# Altium PCB TDII_PCB_R00.PcbDoc
Units mm, origin at the board's own origin, x right, y up, seen from the top; angles counter-clockwise.
Board outline 49.5 x 70.5 mm, 2 copper layers (Top Layer, Bottom Layer); 71 components, 57 nets, 308 pads, 48 vias.
Unrouted connection lines stored in the file: 1.
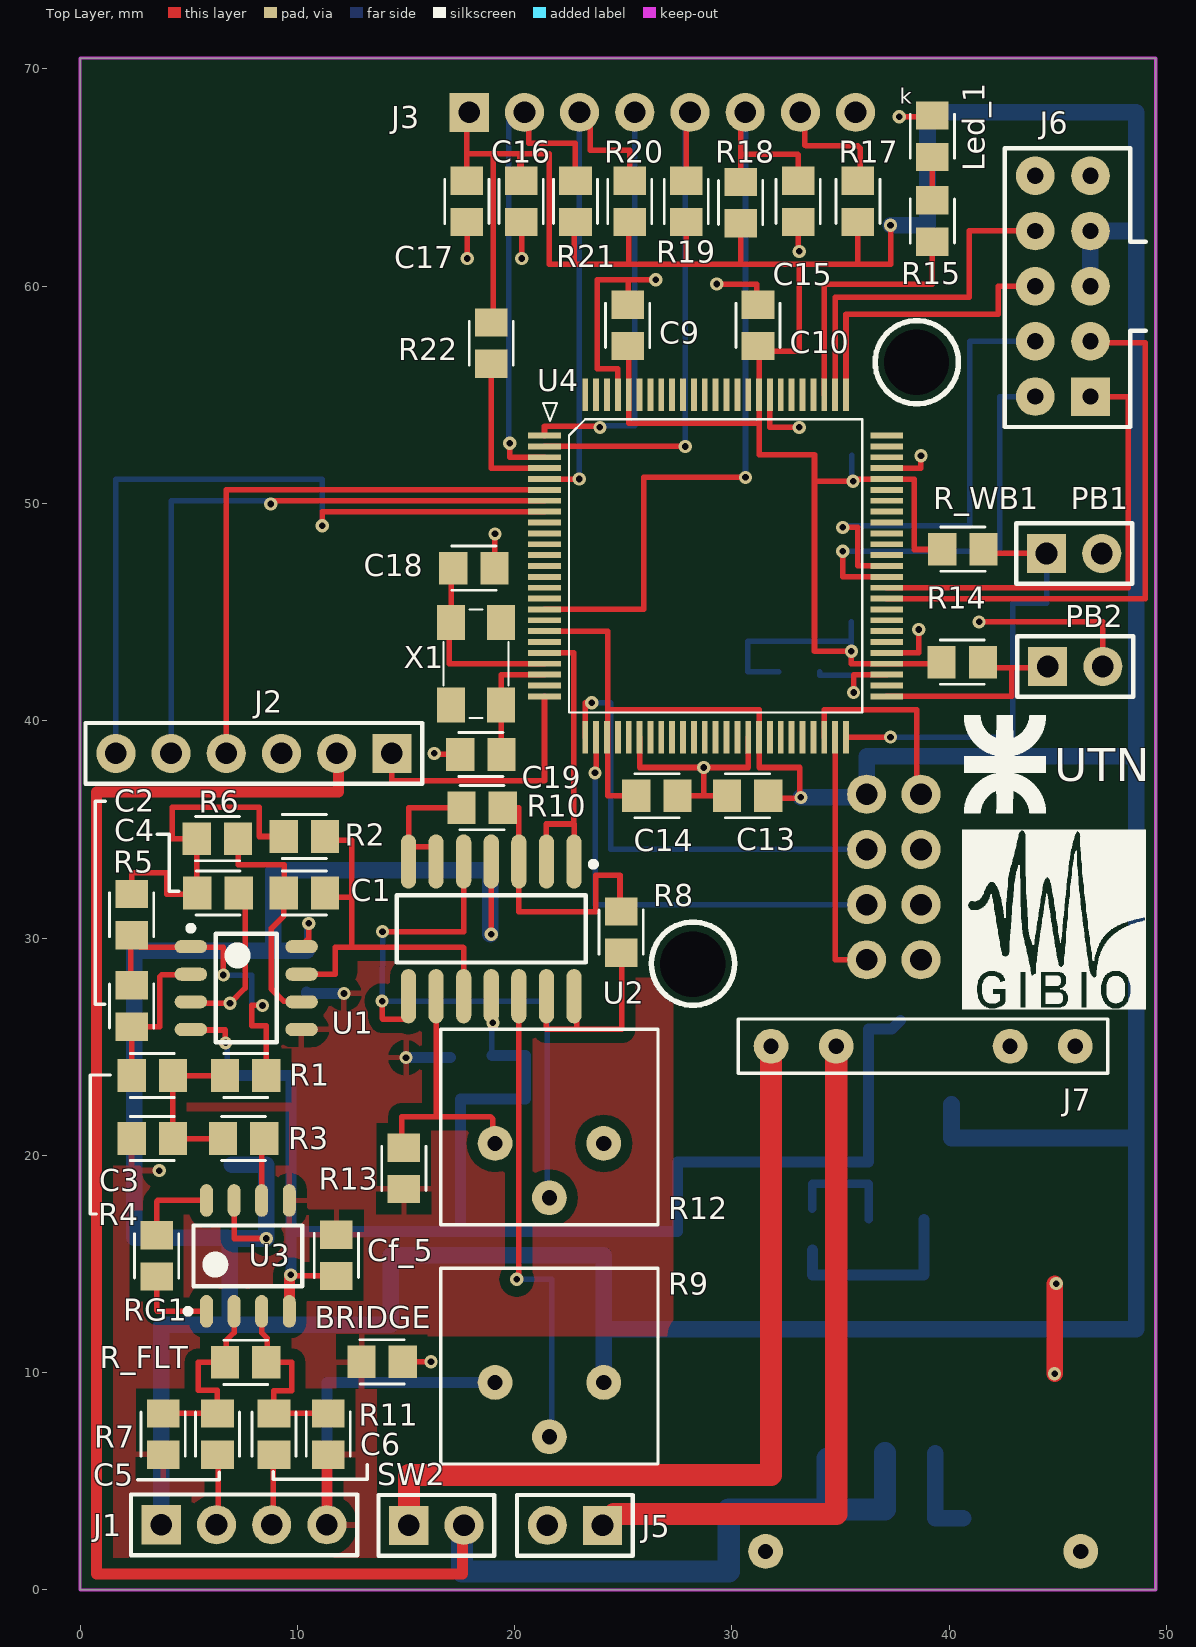
[diagram p0: Top Layer view]
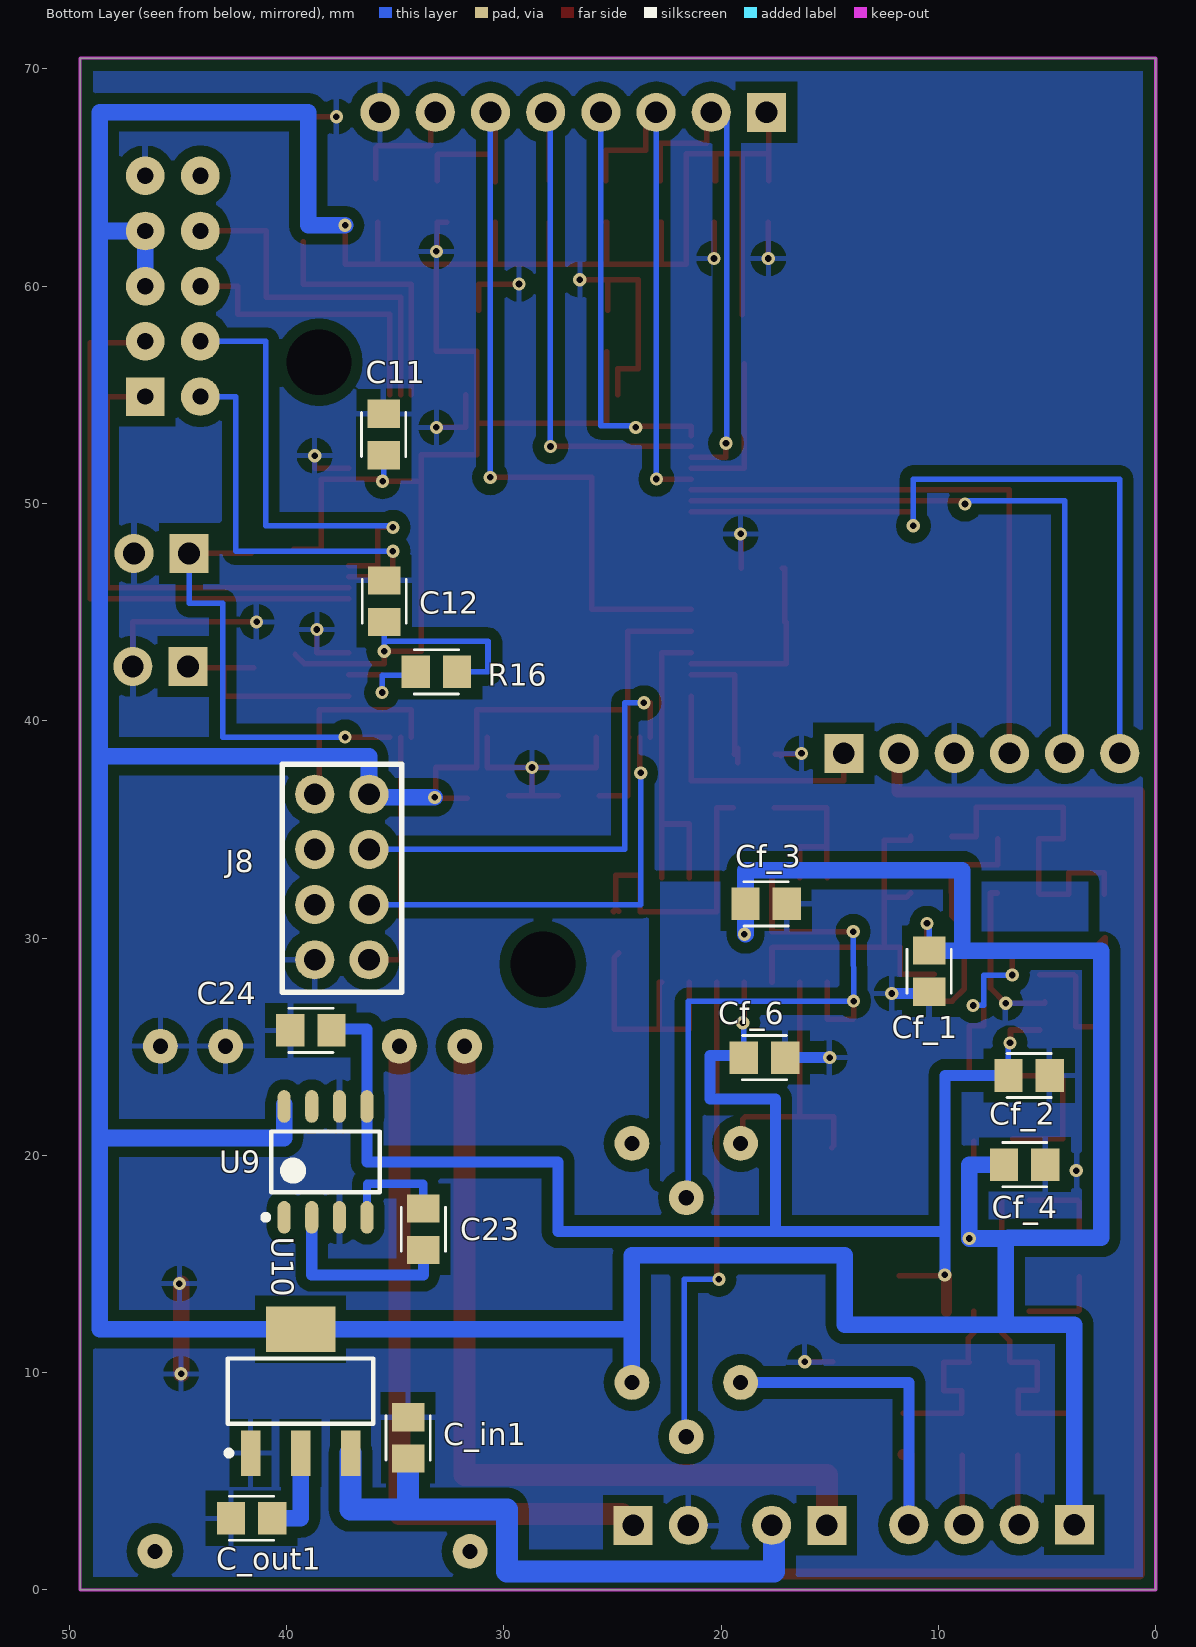
[diagram p1: Bottom Layer view, seen from below]
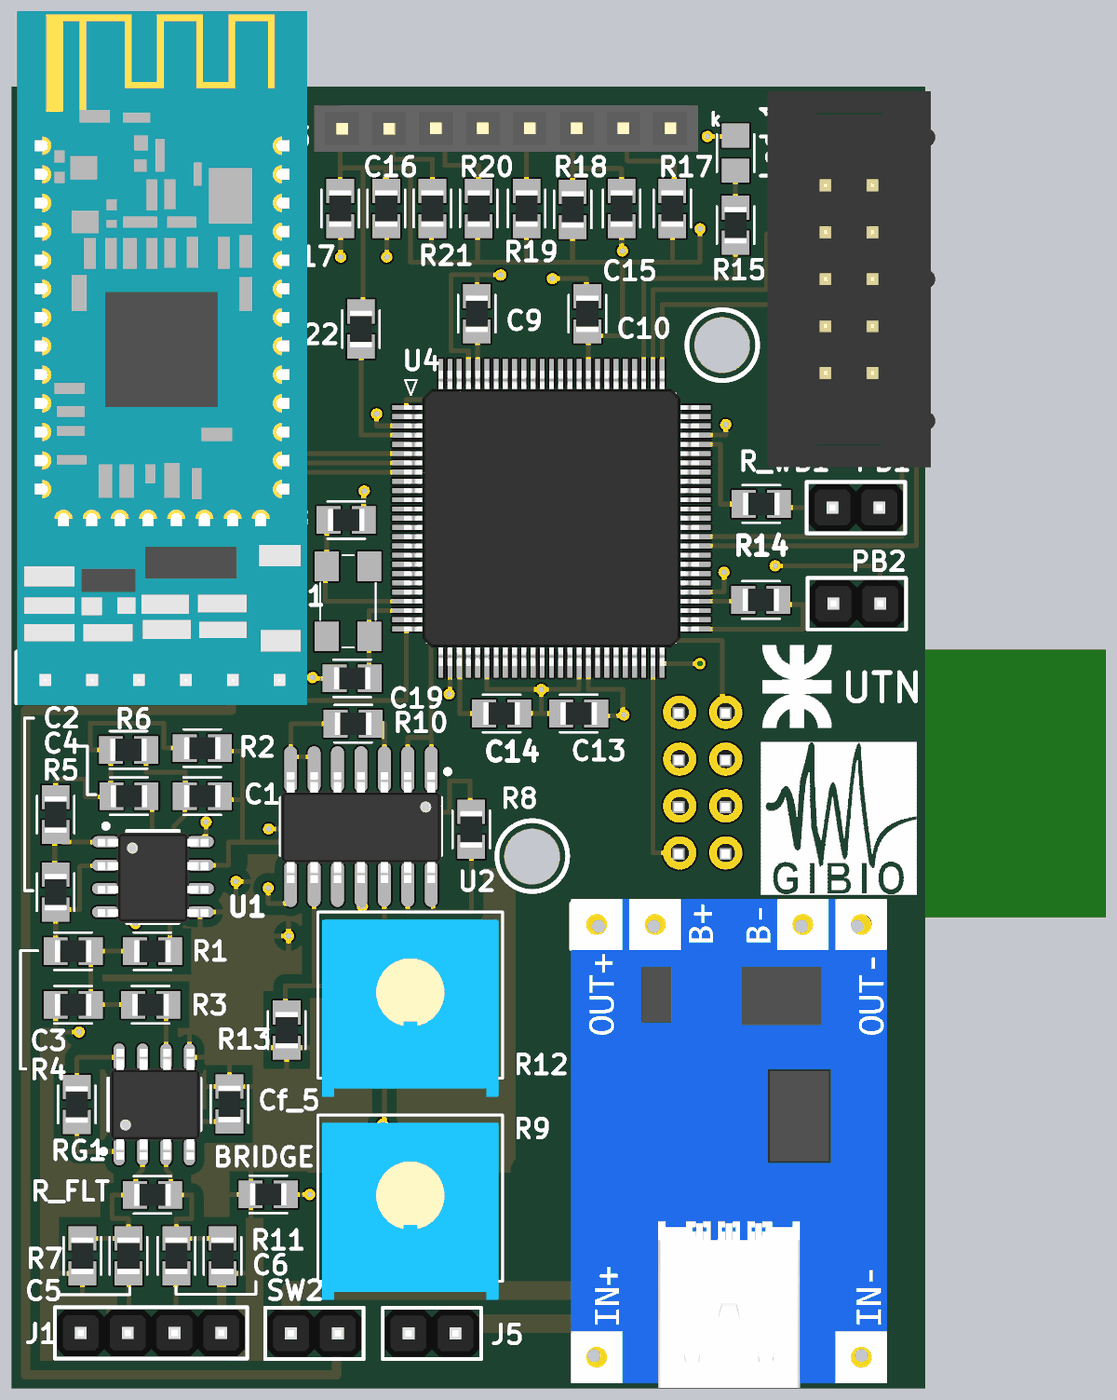
[diagram p2: 3D render of the assembled board from above, using the file's embedded part models]
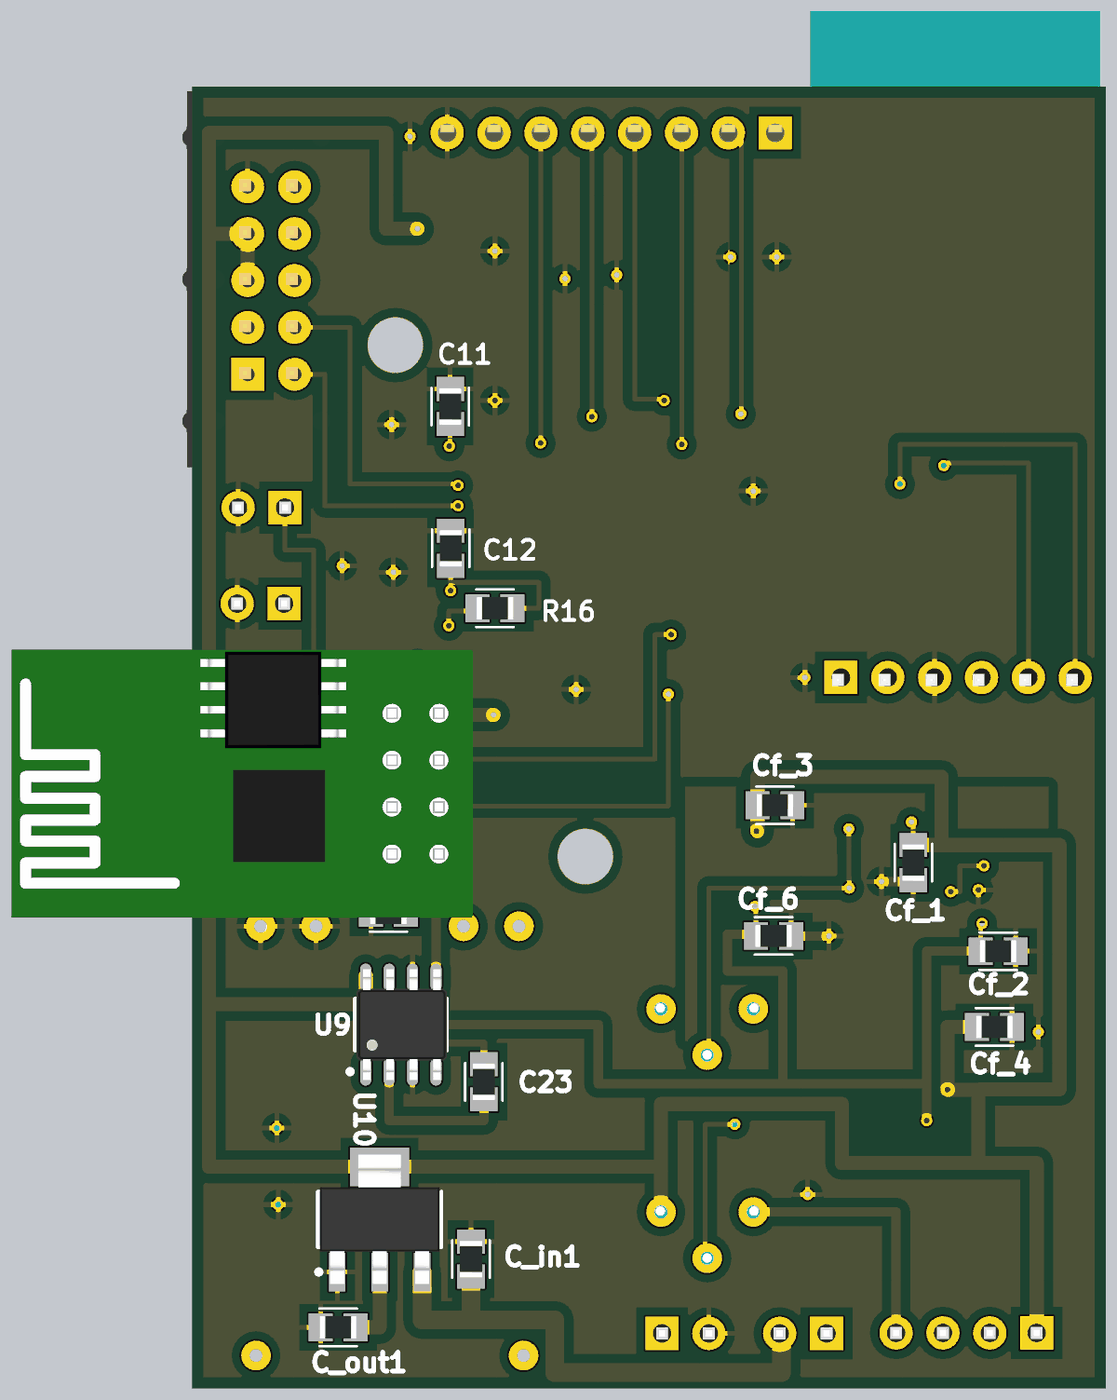
[diagram p3: 3D render of the assembled board from below, using the file's embedded part models]

## Layer stack, top to bottom
Top Layer: signal copper 0.0356
Dielectric: dielectric 0.32, FR-4, Dk 4.8
Bottom Layer: signal copper 0.0356

## Board outline
0,0 0,70.5 49.5,70.5 49.5,0

## Design rules (kind name [scope] priority, off if disabled: settings)
Clearance Clearance_3 [InPolygon] p1: gap=0.508
Clearance [All] p2: gap=0.152
PolygonConnect [All] p1: connectstyle=Relief reliefconductorwidth=0.254 reliefentries=4 polygonreliefangle="90 Angle"
RoutingVias [All] p1: holewidth=0.305 width=0.61 viastyle="Through Hole" minholewidth=0.305 minwidth=0.61 maxholewidth=0.305 maxwidth=0.61
SilkscreenOverComponentPads [All] p1: minsilkscreentomaskgap=0.254
SolderMaskExpansion [All] p1: expansion=0.102
Width Width_1 [InNet('+VCC_5V')] p1: maxlimit=1.27 minlimit=0.254 preferedwidth=0.762
Width [All] p2: maxlimit=1.27 minlimit=0.254 preferedwidth=0.254
27 further rules are at their usual default settings.

## Classes and differential pairs
component class U_TDII_PWR_R00: C23 C24 C_in1 C_out1 J5 J7 SW2 U9 U10
component class U_TDII_ANALOG_R00: BRIDGE C1 C2 C3 C4 C5 C6 Cf_1 Cf_2 Cf_3 Cf_4 Cf_5 Cf_6 J1 R1 R2 R3 R4 R5 R6 R7 R8 R9 R10 R11 R12 R13 R_FLT RG1 U1 U2 U3
component class U_TDII_CPU_R00: C9 C10 C11 C12 C13 C14 C15 C16 C17 C18 C19 J3 Led_1 PB1 PB2 R14 R15 R16 R17 R18 R19 R20 R21 R22 R_WB1 U4 X1
component class U_TDII_WIFI_R00: J8
component class U_TDII_BT_R00: J2
component class U_TDII_TFT_R00: J6

## Components (designator, comment, footprint, x,y, rotation, side; value= is the part's Value field where it differs from the comment)
BRIDGE "Res1" R_0805 13.9,10.5 r0 top
C1 "15nF     50V     X7R" C_0805 10.325,32.075 r0 top
C2 "2.7nF     50V     X7R" C_0805 2.375,26.875 r90 top
C3 "39nF     50V     X7R" C_0805 3.325,20.775 r0 top
C4 "39nF     50V     X7R" C_0805 6.35,32.075 r180 top
C5 "10uF    6.3V     X7R" C_0805 6.325,7.175 r90 top
C6 "10uF    6.3V     X7R" C_0805 8.925,7.175 r90 top
C9 "100nF   50V   X7R" C_0805 25.2,58.2 r90 top
C10 "100nF   50V   X7R" C_0805 31.2,58.2 r90 top
C11 "100nF   50V   X7R" C_0805 35.525,53.175 r90 bottom
C12 "100nF   50V   X7R" C_0805 35.5,45.5 r90 bottom
C13 "100nF   50V   X7R" C_0805 30.725,36.55 r180 top
C14 "100nF   50V   X7R" C_0805 26.55,36.55 r0 top
C15 "100nF   50V   X7R" C_0805 33.05,63.9 r270 top
C16 "10nF    50V     X7R" C_0805 20.3,63.9 r270 top
C17 "100nF   50V   X7R" C_0805 17.8,63.9 r270 top
C18 "18pF   50V   COG" C_0805 18.125,47.025 r180 top
C19 "18pF   50V   COG" C_0805 18.45,38.45 r0 top
C23 "10uF    6.3V     X7R" C_0805 33.7,16.6 r90 bottom
C24 "10uF    6.3V     X7R" C_0805 38.875,25.75 r0 bottom
C_in1 "100nF     50V     X7R" C_0805 34.4,7 r90 bottom
C_out1 "10uF    6.3V     X7R" C_0805 41.6,3.3 r0 bottom
Cf_1 "100nF     50V     X7R" C_0805 10.425,28.475 r90 bottom
Cf_2 "100nF     50V     X7R" C_0805 5.825,23.675 r0 bottom
Cf_3 "100nF     50V     X7R" C_0805 17.925,31.575 r0 bottom
Cf_4 "100nF     50V     X7R" C_0805 6.025,19.575 r0 bottom
Cf_5 "100nF     50V     X7R" C_0805 11.8,15.4 r90 top
Cf_6 "100nF     50V     X7R" C_0805 18,24.5 r0 bottom
J1 "SGN_IN" HEADER_1X4 7.55,3 r0 top
J2 "Header_6" HEADER_1x6 8,38.5 r180 top
J3 "Header M  0.1\" 1x8" HEADER_THT 26.8,68 r0 top
J5 "Conector Bateria" HEADER_1x2 22.775,3.075 r180 top
J6 "TFT_HEADER" Conector_TFT 46.5,60 r90 top
J7 "Conector 0.100\" - 4 pines" HEADER_CHARGER 45.8,25.025 r180 top
J8 "WIFI_HEADER" Header_WIFI 37.7,32.5 r0 bottom
Led_1 "Led Rojo" LED_0805 39.225,66.9 r90 top
PB1 "Push Button" HEADER_1x2 45.75,47.6 r0 top
PB2 "Push Button" HEADER_1x2 45.8,42.4 r0 top
R1 "68k     5%" R_0805 7.625,23.675 r0 top
R2 "27k     5%" R_0805 10.325,34.675 r0 top
R3 "68k     5%" R_0805 7.525,20.775 r180 top
R4 "56k     5%" R_0805 3.325,23.675 r0 top
R5 "27k     5%" R_0805 2.375,31.075 r270 top
R6 "27k     5%" R_0805 6.325,34.575 r180 top
R7 "100k       5%" R_0805 3.825,7.175 r270 top
R8 "10k     5%" R_0805 24.9,30.275 r90 top
R9 "100k   5%" Preset 21.6,8.3 r0 top
R10 "10k     5%" R_0805 18.5,36 r0 top
R11 "100k       5%" R_0805 11.425,7.175 r90 top
R12 "100k   5%" Preset 21.6,19.3 r0 top
R13 "4k7     5%" R_0805 14.9,19.4 r90 top
R14 "1k    5%" R_0805 40.6,42.7 r180 top
R15 "1k    5%" R_0805 39.225,63 r270 top
R16 "10k    5%" R_0805 33.1,42.25 r180 bottom
R17 "10k    5%" R_0805 35.8,63.9 r270 top
R18 "10k    5%" R_0805 30.4,63.85 r270 top
R19 "10k    5%" R_0805 27.9,63.9 r270 top
R20 "10k    5%" R_0805 25.3,63.9 r270 top
R21 "10k    5%" R_0805 22.8,63.9 r270 top
R22 "10k    5%" R_0805 18.925,57.375 r270 top
R_FLT "100k       5%" R_0805 7.625,10.475 r180 top (schematic designator R_FILTER1)
R_WB1 "1k    5%" R_0805 40.625,47.9 r180 top
RG1 "100     5%" R_0805 3.525,15.375 r90 top
SW2 "ON/OFF" HEADER_1x2 16.4,2.875 r0 top
U1 "LM324AM/NOPB" SOI8 7.65,27.7 r0 top
U2 "LM324AM/NOPB" SOIC14 18.925,30.375 r270 top
U3 "AD620ARZ" SOI8 7.725,15.375 r90 top
U4 "LPC1769FBD100" LQFP100 29.25,47.125 r90 top
U9 "TL7660CD" SOI8 38.2,19.7 r90 bottom
U10 "TPS73733DCQ" SOT-223-4 39.35,9.15 r180 bottom
X1 "ABM3C-12.000MHZ-D4Y-T" ABM3C 18.225,42.625 r90 top

## Footprints (in the part's own frame and the unit in brackets; to place one, negate y for a bottom-side part, rotate by r counter-clockwise, add the part's x,y. Pads: shape width x height; smd on the part's side, far side on the other; paste and mask are expansions set on the pad)
ABM3C [mm]
  rect 1.6x1.3 smd: 1(1.9,1.15) 2(-1.9,1.15) 3(-1.9,-1.15) 4(1.9,-1.15)
  silkscreen extent -2.5,-1.5 2.5,1.5
C_0805 [mm]
  rect 1.3x1.5 smd: 1(-0.95,0) 2(0.95,0)
  silkscreen extent -1.02,-1.02 1.02,1.02, body extent -1,-0.6 1,0.6, height 0.45
Conector_TFT [mil]
  rect 70x70 hole 29.53: 1(-200,0)
  round 70 hole 29.53: 2(-200,100) 3(-100,0) 4(-100,100) 5(0,0) 6(0,100) 7(100,0) 8(100,100) 9(200,0) 10(200,100)
  silkscreen extent -255,-100 250,155, body extent -398,-140 404,219, height 118
HEADER_1x2 [mm]
  rect 1.8x1.8 hole 1: 1(-1.27,0.1)
  round 1.8 hole 1: 2(1.27,0.1)
  silkscreen extent -2.67,-1.3 2.67,1.5, body extent -2.54,-1.17 2.54,1.37, height 8.55
HEADER_1X4 [mm]
  rect 1.8x1.8 hole 1: 1(-3.81,0)
  round 1.8 hole 1: 2(-1.27,0) 3(1.27,0) 4(3.81,0)
  silkscreen extent -5.21,-1.4 5.21,1.4, body extent -5.08,-1.27 5.08,1.27, height 8.55
HEADER_1x6 [mm]
  rect 1.8x1.8 hole 1: 1(-6.35,0)
  round 1.8 hole 1: 2(-3.81,0) 3(-1.27,0) 4(1.27,0) 5(3.81,0) 6(6.35,0)
  silkscreen extent -7.75,-1.4 7.75,1.4, body extent -8,-36.1 7.7,1.5, height 6.31
HEADER_CHARGER [mm]
  round 1.6 hole 0.7: 1(0,0) 2(14,0) 3(11,0) 4(3,0) 5(14.25,23.25) 6(-0.25,23.25)
  silkscreen extent -1.5,-1.25 15.5,1.25, body extent -1.65,-1.5 15.5,25, height 5.65
HEADER_THT [mm]
  rect 1.8x1.8 hole 1: 1(-8.89,0)
  round 1.8 hole 1: 2(-6.35,0) 3(-3.81,0) 4(-1.27,0) 5(1.27,0) 6(3.81,0) 7(6.35,0) 8(8.89,0)
  body extent -10.41,-1.04 10.41,1.5, height 8.5
Header_WIFI [mm]
  round 1.8 hole 1: 1(-1.5,3.5) 2(-1.5,0.96) 3(-1.5,-1.58) 4(-1.5,-4.12) 5(1,3.5) 6(1,0.96) 7(1,-1.58) 8(1,-4.12)
  silkscreen extent -3,-5.5 2.5,5, body extent -3.4,-7.5 21.6,7, height 5.8
LED_0805 [mm]
  rect 1.3x1.5 smd: 1(-0.95,0) 2(0.95,0)
  silkscreen extent -1.02,-1.02 1.02,1.02
LQFP100 [mm]
  rect 0.27x1.5 smd: 1(6,7.875) 2(5.5,7.875) 3(5,7.875) 4(4.5,7.875) 5(4,7.875) 6(3.5,7.875) 7(3,7.875) 8(2.5,7.875) 9(2,7.875) 10(1.5,7.875) 11(1,7.875) 12(0.5,7.875) 13(0,7.875) 14(-0.5,7.875) 15(-1,7.875) 16(-1.5,7.875) 17(-2,7.875) 18(-2.5,7.875) 19(-3,7.875) 20(-3.5,7.875) 21(-4,7.875) 22(-4.5,7.875) 23(-5,7.875) 24(-5.5,7.875) 25(-6,7.875) 51(-6,-7.875) 52(-5.5,-7.875) 53(-5,-7.875) 54(-4.5,-7.875) 55(-4,-7.875) 56(-3.5,-7.875) 57(-3,-7.875) 58(-2.5,-7.875) 59(-2,-7.875) 60(-1.5,-7.875) 61(-1,-7.875) 62(-0.5,-7.875) 63(0,-7.875) 64(0.5,-7.875) 65(1,-7.875) 66(1.5,-7.875) 67(2,-7.875) 68(2.5,-7.875) 69(3,-7.875) 70(3.5,-7.875) 71(4,-7.875) 72(4.5,-7.875) 73(5,-7.875) 74(5.5,-7.875) 75(6,-7.875)
  rect 1.5x0.27 smd: 26(-7.875,6) 27(-7.875,5.5) 28(-7.875,5) 29(-7.875,4.5) 30(-7.875,4) 31(-7.875,3.5) 32(-7.875,3) 33(-7.875,2.5) 34(-7.875,2) 35(-7.875,1.5) 36(-7.875,1) 37(-7.875,0.5) 38(-7.875,0) 39(-7.875,-0.5) 40(-7.875,-1) 41(-7.875,-1.5) 42(-7.875,-2) 43(-7.875,-2.5) 44(-7.875,-3) 45(-7.875,-3.5) 46(-7.875,-4) 47(-7.875,-4.5) 48(-7.875,-5) 49(-7.875,-5.5) 50(-7.875,-6) 76(7.875,-6) 77(7.875,-5.5) 78(7.875,-5) 79(7.875,-4.5) 80(7.875,-4) 81(7.875,-3.5) 82(7.875,-3) 83(7.875,-2.5) 84(7.875,-2) 85(7.875,-1.5) 86(7.875,-1) 87(7.875,-0.5) 88(7.875,0) 89(7.875,0.5) 90(7.875,1) 91(7.875,1.5) 92(7.875,2) 93(7.875,2.5) 94(7.875,3) 95(7.875,3.5) 96(7.875,4) 97(7.875,4.5) 98(7.875,5) 99(7.875,5.5) 100(7.875,6)
  silkscreen extent -6.75,-6.75 7.49,7.94, body extent -8,-8 8,8, height 1.2
Preset [mm]
  round 1.6 hole 0.7: 1(-2.5,1.25) 2(2.5,1.25) 3(0,-1.25)
  silkscreen extent -5,-2.5 5,6.5, body extent -4.79,-3.5 4.79,6.08, height 5
R_0805 [mm]
  rect 1.3x1.5 smd: 1(-0.95,0) 2(0.95,0)
  silkscreen extent -1.02,-1.02 1.02,1.02, body extent -1,-0.6 1,0.6, height 0.45
SOI8 [mm]
  oval 1.5x0.6 smd: 1(-2.55,1.905) 2(-2.55,0.635) 3(-2.55,-0.635) 4(-2.55,-1.905) 5(2.55,-1.905) 6(2.55,-0.635) 7(2.55,0.635) 8(2.55,1.905)
  silkscreen extent -2.67,-2.5 1.4,2.88, body extent -3,-2.5 3,2.4, height 1.75
SOIC14 [mm]
  oval 2.5x0.7 smd: 1(-3.15,3.81) 2(-3.15,2.54) 3(-3.15,1.27) 4(-3.15,0) 5(-3.15,-1.27) 6(-3.15,-2.54) 7(-3.15,-3.81) 8(3.05,-3.81) 9(3.05,-2.54) 10(3.05,-1.27) 11(3.05,0) 12(3.05,1.27) 13(3.05,2.54) 14(3.05,3.81)
  silkscreen extent -3.15,-4.35 1.5,4.83, body extent -3,-4.35 3,4.35, height 1.75
SOT-223-4 [mm]
  rect 0.9x2.1 smd: 1(-2.3,-2.85) 2(0,-2.85) 3(2.3,-2.85)
  rect 3.2x2.1 smd: 4(0,2.85)
  silkscreen extent -3.43,-2.97 3.35,1.5, body extent -3.25,-3.5 3.25,3.5, height 1.7

## Part data
BRIDGE: "Resistor"
C1 C2 C3 C4 C5 C6 C9 C10 C11 C12 C13 C14 C15 C16 C17 C18 C19 C23 C24 C_in1 C_out1 Cf_1 Cf_2 Cf_3 Cf_4 Cf_5 Cf_6: library part CAP
J1: library part "Conector_4 ( 0.100\")"
J2: library part "Conector_6 ( 0.100¨)"
J3: library part Header
J5: library part "Conector_2 ( 0.100\")"
J6: library part "Conector_9 (0.100¨)"
J8: library part "Conector_8 ( 0.100¨)"
Led_1: library part LED
R1 R2 R3 R4 R5 R6 R7 R8 R10 R11 R13 R14 R15 R16 R17 R18 R19 R20 R21 R22 R_FLT R_WB1 RG1: library part RES
R9 R12: library part "RPot SM", "Square Trimming Potentiometer"
SW2: library part SWITCH, "Switch, generic"
U1: library part LM358M, "Low Power Dual Operational Amplifier, 8-pin Narrow SOIC"
U2: library part LM324M, "Low Power Quad Operational Amplifier, 14-pin Narrow SOIC"
U3: library part AD620
U4: library part LPC1768FBD100, "CPU Cortex M3"
U9: library part TL7660
U10: library part TLV1117-33CKVURG3, "LDO Voltage Regulators Sgl Output LDO 800mA Fixed Int Crnt limit"
X1: library part ABM3_CRISTAL

## Free pads (board coordinates)
  round 2.2 hole 3: 0(38.5,56.5) 1(28.2,28.8)

## Via types
v1: diameter 0.61, hole 0.305, Top Layer to Bottom Layer, 48 vias

## Nets (pads, with @x,y where several pads share a name; then routed paths per layer and width w, separated by ;. In a path a pad name is that pad's centre, name@x,y a point inside that pad or via, vN(x,y) a via of type N, cw(c..) or ccw(c..) an arc to the next point about the centre after c; other vN are vias at no path point)
+3V3: C9.1 C10.1 C11.1 C12.1 C13.1 C14.1 C16.1 C17.1 C_out1.1 Cf_1.2 Cf_3.2 Cf_4.2 J1.1 J3.1 J6.5 J6.7 J8.4 R9.2 R14.2 R16.2 R17.2 R18.2 R19.2 R20.2 R21.2 R22.1 R_WB1.2 U1.8 U2.4 U3.7 U4.19 U4.28 U4.42 U4.54 U4.71 U4.84 U4.96 U9.8 U10.2 U10.4 | length 367.6
  Top Layer w0.254: U3.7 7.09,16.175 v1(8.575,16.175) ; U1.8@10.125,29.58 10.525,29.98 v1(10.525,30.675) ; C17.1 17.8,66.1 ; J3.1@18.11,68 J3.1 17.8,68 17.8,66.1 ; v1(18.925,30.175) U2.4@18.925,32.775 ; R22.1@19.025,58.675 19.025,66.1 ; U4.19 24.284,44.125 24.284,40.5 ; R21.2 22.75,62.95 22.75,61 ; U4.28 U4.28@24.284,39.25 ; C9.1@25.25,56.975 U4.96 25.25,53.7 31.25,53.7 ; R20.2 25.25,62.95 25.25,61 ; C14.1 24.284,36.55 U4.28@24.284,39.25 ; R19.2 27.9,61 ; R18.2@30.4,62.95 R18.2 30.4,61 ; C13.1@31.675,36.425 33.125,36.425 33.125,37.85 31.25,37.85 U4.42 31.25,40.5 24.284,40.5 ; v1(35.575,51.025) 33.8,51.025 ; v1@35.575,51.039 35.575,51.125 U4.71 38.4,51.125 38.4,47.9 ; R17.2 35.8,61 ; v1(37.3,62.8) 37.3,61 35.8,61 ; R14.2@39.6,43.05 39.175,42.625 U4.54 35.5,42.625 v1(35.5,43.2) 33.8,43.2 33.8,51.025 ; 17.8,66.1 19.025,66.1 ; 19.025,66.1 20.244,66.1 20.244,64.85 C16.1 20.3,66.1 21.6,66.1 21.6,61 22.75,61 ; 22.75,61 25.25,61 ; U4.28@24.284,39.25 24.284,40.5 ; 25.25,61 27.9,61 ; 27.9,61 30.4,61 ; 30.4,61 33.1,61 ; 31.25,53.7 31.25,52.25 33.8,52.25 33.8,51.025 ; 31.25,53.7 U4.84 31.25,57 33.1,57 33.1,61 ; 33.1,61 35.8,61 ; 38.4,47.9 38.4,47.875 39.675,47.875 R_WB1.2 38.4,47.9
  Bottom Layer w0.254: 6.775,16.2 6.9,16.075 ; Cf_1.2 10.425,30.675 v1(10.525,30.675) ; R16.2 30.725,42.25 30.725,43.65 35.5,43.65 ; v1(35.5,43.2) 35.5,43.65 ; C12.1 35.5,43.65 ; v1@35.525,51.025 C11.1
  Bottom Layer w0.762: J1.1 3.74,12.2 6.9,12.2 ; 6.775,16.2 2.5,16.2 2.5,29.425 Cf_1.2 ; Cf_4.2 8.575,19.575 v1(8.575,16.175) 6.9,16.175 6.9,16.075 6.9,12.2 ; 8.9,29.475 8.9,33.125 18.875,33.125 Cf_3.2 v1@18.875,30.175 ; R9.2 24.1,12 ; v1(33.175,36.475) 36.055,36.475 J8.4 36.2,38.375 48.6,38.375 ; v1(37.3,62.8) 39,62.8 39,68 48.6,68 48.6,62.54 ; U10.2 39.35,3.3 C_out1.1 ; U9.8@40.105,22.35 U9.8 40.105,20.8 48.6,20.8 ; J6.5 J6.7 48.6,62.54 ; 6.9,12.2 14.3,12.2 14.3,15.4 24.1,15.4 24.1,12 ; 24.1,12 U10.4 48.6,12 48.6,20.8 ; 48.6,20.8 48.6,38.375 ; 48.6,38.375 48.6,62.54
+BAT: J5.1 J7.3 | length 32.5
  Top Layer w1.016: J5.1 24.57,3.5 34.8,3.5 J7.3
-3V3: C24.1 Cf_2.2 Cf_5.1 Cf_6.2 U1.4 U2.11 U3.4 U9.5 | length 74.5
  Top Layer w0.254: U1.4@5.325,25.77 6.68,25.77 v1@6.68,25.195 ; U3.4 9.63,14.45 Cf_5.1 ; U2.11@18.925,26.1 U2.11@18.925,27.975
  Top Layer w0.508: U3.4 v1@9.63,14.5
  Bottom Layer w0.254: Cf_2.2 v1@6.775,25.025 ; Cf_6.2 18.95,24.6 v1@18.95,26.1
  Bottom Layer w0.508: Cf_2.2 9.7,23.675 9.7,16.5 ; v1(9.7,14.5) 9.7,16.5 ; Cf_6.2@18.95,24.6 20.5,24.6 20.5,22.6 17.5,22.6 17.5,16.5 ; C24.1@37.75,26.2 37.375,25.825 36.295,25.825 36.295,22.35 36.295,19.7 27.5,19.7 27.5,16.5 17.5,16.5 ; 9.7,16.5 17.5,16.5
  other v1: 6.7,25.175 19,26.1
\T\R\S\T\: R22.2 U4.4 | length 7.2
  Top Layer w0.254: R22.2 18.925,51.625 U4.4
AGND: BRIDGE.1 C3.1 C4.1 Cf_1.1 Cf_2.1 Cf_3.1 Cf_4.1 Cf_5.2 Cf_6.1 J1.4 R7.2 R9.1 R11.1 R13.1 U1.3 U1.5 U3.5 | length 29.2
  Top Layer w0.254: U1.3 5.1,27 v1(6.9,27) 7.6,27.7 7.6,32.075 C4.1
  Top Layer w0.508: J1.4 11.36,6.225 R11.1@11.625,6.225
  Bottom Layer w0.508: Cf_1.1 10.425,27.45 v1(12.15,27.45) ; J1.4 11.36,9.55 R9.1 ; v1(15,24.5) Cf_6.1
  other v1: 3.65,19.3
CS: J6.4 U4.63 | length 21.2
  Top Layer w0.254: v1(35.1,48.9) 35.8,48.9 35.8,47.125 U4.63
  Bottom Layer w0.254: v1(35.1,48.9) 35.1,48.975 40.95,48.975 40.95,57.46 J6.4
D/C: J6.8 U4.77 | length 16.7
  Top Layer w0.254: U4.77 34.75,59.5 40.92,59.5 40.92,62.54 J6.8
FILTRO_IN: R3.1 U3.6 | length 2.7
  Top Layer w0.254: U3.6 R3.1@8.36,20.66
FILTRO_OUT: C1.2 R2.2 U1.7 U2.10 | length 17.9
  Top Layer w0.254: U1.7 11.75,28.335 11.75,29.575 12.5,29.575 ; C1.2 11.475,31.875 12.5,31.875 ; R2.2 11.275,34.5 12.5,34.5 12.5,31.875 ; 17.625,29.575 12.5,29.575 ; U2.10@17.655,27.975 17.655,29.545 ; 12.5,29.575 12.5,31.875
GND: BRIDGE.2 C9.2 C10.2 C11.2 C12.2 C13.2 C14.2 C15.2 C16.2 C17.2 C18.1 C19.1 C24.2 C_in1.2 C_out1.2 J2.3 J3.8 J5.2 J6.9 J7.1 J7.4 J8.5 Led_1.2 PB1.2 PB2.2 U4.31 U4.41 U4.55 U4.72 U4.83 U4.97 U9.3 U9.6 U10.1 | length 54.6
  Top Layer w0.254: BRIDGE.2 v1(16.15,10.5) ; v1@16.6,38.45 C19.1 ; C19.1@17.25,38.4 C19.1@17.3,38.45 ; v1(17.825,61.275) C17.2@17.825,62.95 ; C18.1 v1@19.075,48.6 ; v1(20.325,61.275) C16.2@20.325,62.95 ; U4.97 24.75,56.2 23.8,56.2 23.8,60.3 25.225,60.3 ; C9.2@25.225,58.9 25.225,60.3 ; U4.31 25.75,37.85 v1(28.7,37.85) ; v1(26.5,60.3) 25.225,60.3 ; C14.2 28.7,36.55 ; v1(29.3,60.1) 31.15,60.1 C10.2@31.15,58.9 ; C13.2 28.7,36.55 ; U4.41 30.75,37.85 v1(28.7,37.85) ; 31.75,53.5 U4.83 ; 31.8,53.5 v1(33.1,53.5) ; C15.2@32.619,62.95 C15.2 v1@33.05,61.6 ; U4.55 38.6,43.125 v1(38.6,44.2) ; U4.72 38.7,51.625 v1(38.7,52.2) ; v1(37.7,67.8) Led_1.2@39.175,67.8 ; v1@41.425,44.55 47.07,44.55 PB2.2 ; 28.7,36.55 v1(28.7,37.85)
  Top Layer w0.762: v1(44.85,9.95) v1@44.85,14.1
  other v1: 44.925,14.1 16.3,38.5 41.375,44.55 19.1,48.6 33.1,61.6
ISP: R16.1 U4.53 | length 4.9
  Top Layer w0.254: v1(35.6,41.3) 35.6,42.125 U4.53
  Bottom Layer w0.254: R16.1 34.05,42.1 35.6,42.1 v1(35.6,41.3)
MISO: J6.1 U4.61 | length 21.7
  Top Layer w0.254: U4.61 48.25,46.125 48.25,54.92 J6.1@46.425,54.92
MOSI: J6.3 U4.60 | length 26.2
  Top Layer w0.254: U4.60 49.025,45.625 49.025,57.4 J6.3@46.5,57.4
NetC1_1: C1.1 R6.1 U1.6 | length 11.2
  Top Layer w0.254: R6.1 7.275,33.375 9.4,33.375 9.4,32.1 C1.1 9.375,31.025 8.8,30.45 8.8,27.668 9.368,27.1 U1.6@10.465,27.1
NetC2_1: C2.1 R4.1 U1.2 | length 7.5
  Top Layer w0.254: C2.1@2.325,25.925 3.675,25.925 3.675,28.225 3.76,28.31 U1.2@5.325,28.31 ; R4.1 C2.1@2.375,25.875
NetC2_2: C2.2 R1.2 R5.2 U1.1 | length 15.5
  Top Layer w0.254: C2.2@2.325,27.825 2.325,30.025 2.77,29.58 6.6,29.58 v1(6.6,28.3) ; v1(8.4,26.9) 7.9,26.9 7.9,25.975 8.575,25.975 R1.2
  Bottom Layer w0.254: v1(6.6,28.3) 7.9,28.3 7.9,26.9 v1(8.4,26.9)
NetC3_2: C3.2 R1.1 R3.2 R4.2 | length 7.6
  Top Layer w0.254: R3.2 C3.2 R4.2 R1.1
NetC4_2: C4.2 R2.1 R5.1 R6.2 | length 16.5
  Top Layer w0.254: R5.1 2.375,33 4,33 4,32.025 5.325,32.025 5.375,32.075 R6.2 4.25,34.575 4.25,36.025 8.25,36.025 8.25,34.675 R2.1
NetC5_2: C5.2 R7.1 R_FLT.2 U3.2 | length 9.4
  Top Layer w0.254: R7.1 C5.2 6.325,9.2 5.45,9.2 5.45,10.475 R_FLT.2 ; R_FLT.2@6.725,10.525 6.725,11.475 7.09,11.84 U3.2
NetC6_2: C6.2 R11.2 R_FLT.1 U3.3 | length 9.5
  Top Layer w0.254: U3.3 8.36,11.84 8.625,11.575 8.625,10.525 R_FLT.1 9.75,10.475 9.75,9.175 8.925,9.175 C6.2 R11.2@11.625,8.125
NetC18_2: C18.2 U4.22 X1.1 | length 8.9
  Top Layer w0.254: X1.1@17,44.525 17,42.625 U4.22 ; X1.1 17.075,47.025 C18.2
NetC19_2: C19.2 U4.23 X1.3 | length 6.4
  Top Layer w0.254: C19.2@19.225,38.075 C19.2@19.225,38.725 ; C19.2 19.375,38.45 X1.3 19.375,42.125 U4.23
NetC23_1: C23.1 U9.2 | length 8.8
  Bottom Layer w0.508: C23.1 33.7,14.5 38.835,14.5 U9.2@38.835,17.05
NetC23_2: C23.2 U9.4 | length 5.4
  Bottom Layer w0.381: C23.2 33.7,18.7 36.295,18.7 U9.4@36.295,17.05
NetJ2_1: J2.1 U4.25 | length 12.2
  Top Layer w0.254: J2.1 14.35,37.25 21.375,37.25 U4.25
NetJ2_6: J2.6 U4.8 | length 35.2
  Top Layer w0.254: v1(11.15,48.975) 11.15,49.625 U4.8
  Bottom Layer w0.254: J2.6 1.65,51.125 11.15,51.125 v1(11.15,48.975)
NetJ3_7: J3.7 R17.1 | length 5.5
  Top Layer w0.254: J3.7@33.35,68 33.35,66.481 33.431,66.481 33.431,66.456 35.794,66.456 35.9,66.35 R17.1@35.9,64.95
NetJ7_2: J7.2 SW2.1 | length 38.7
  Top Layer w1.016: SW2.1 15.13,5.3 31.8,5.3 J7.2
NetJ8_2: J8.2 U4.27 | length 20.3
  Top Layer w0.254: v1(23.7,37.6) 23.75,37.6 U4.27
  Bottom Layer w0.254: v1(23.7,37.6) 23.7,31.54 J8.2
NetJ8_3: J8.3 U4.26 | length 21.3
  Top Layer w0.254: U4.26 23.25,40.825 v1(23.55,40.825)
  Bottom Layer w0.254: v1(23.55,40.825) 24.425,40.825 24.425,34.08 J8.3
NetLed_1_1: Led_1.1 R15.1 | length 2
  Top Layer w0.254: R15.1 Led_1.1
NetR8_2: R8.2 R10.2 U2.3 | length 13.7
  Top Layer w0.254: R10.2 20.195,36 20.195,31.205 23.725,31.205 23.725,32.9 24.85,32.9 24.85,31.375 R8.2@24.7,31.225 ; R8.2@24.93,31.205 R8.2@24.95,31.225
NetR9_3: R9.3 U2.12 | length 22.7
  Top Layer w0.254: v1(20.1,14.3) 20.195,14.395 U2.12@20.195,27.975
  Bottom Layer w0.254: v1(20.1,14.3) 21.7,14.3 21.7,7.05 R9.3
NetR12_1: R12.1 R13.2 U2.9 | length 13.1
  Top Layer w0.254: R13.2 14.815,20.435 14.815,21.785 16.385,21.785 ; U2.9@16.385,27.975 16.385,21.785 ; R12.1@19,20.45 19,21.67 18.885,21.785 16.385,21.785
NetR12_3: R12.3 U2.5 U2.8 | length 29.9
  Top Layer w0.254: v1(13.9,27.1) 13.9,26.3 13.935,26.265 15.115,26.265 U2.8@15.115,27.975 ; v1(13.921,30.3) 17.655,30.3 U2.5@17.655,32.775
  Bottom Layer w0.254: v1(13.921,30.3) v1(13.9,27.1) 21.5,27.1 R12.3@21.5,17.95
NetR15_2: R15.2 U4.78 | length 12
  Top Layer w0.254: U4.78 34.25,60.1 39.225,60.1 R15.2
NetRG1_1: RG1.1 U3.1 | length 3.9
  Top Layer w0.254: RG1.1 3.525,12.875 3.575,12.825 U3.1
NetRG1_2: RG1.2 U3.8 | length 3.9
  Top Layer w0.254: RG1.2 3.525,17.875 3.575,17.925 U3.8
NetU2_1: U2.1 U2.2 U4.21 | length 15.4
  Top Layer w0.254: U4.21 22.725,43.125 22.725,35.25 21.465,35.25 U2.2 U2.2@21.465,32.775 ; U2.1@22.735,32.775 U2.1 22.735,35.24
OFFSET_OUT: R8.1 U2.13 U2.14 | length 11.5
  Top Layer w0.254: U2.13@21.465,27.975 21.465,25.8 22.85,25.8 ; U2.14@22.735,27.975 22.85,27.975 22.85,25.8 ; R8.1@24.7,29.325 24.925,29.1 24.925,25.8 22.85,25.8
ON/OFF_TX: PB1.1 R_WB1.1 U4.50 | length 20.5
  Top Layer w0.254: U4.50 v1(37.3,39.25) ; R_WB1.1@41.625,47.7 PB1.1
  Bottom Layer w0.254: v1(37.3,39.25) 42.925,39.25 42.925,45.4 44.48,45.4 PB1.1
RESET: J6.6 U4.76 | length 13.7
  Top Layer w0.254: U4.76 35.25,58.7 42.25,58.7 42.25,60 J6.6
RST: C15.1 J3.6 R18.1 U4.17 | length 39.2
  Top Layer w0.254: U4.17 25.95,45.125 25.95,51.2 v1(30.625,51.2) ; R18.1 30.4,66.075 ; J3.6@30.4,68 30.4,66.075 ; C15.1 33.05,66.05 33.025,66.075 30.4,66.075
  Bottom Layer w0.254: J3.6 30.625,68 v1(30.625,51.2) ; J3.6@30.8,67.99 J3.6@30.81,68
RX2_BT: J2.5 U4.7 | length 28.9
  Top Layer w0.254: v1@8.775,50.125 U4.7
  Bottom Layer w0.254: J2.5 4.19,50.125 8.625,50.125 v1(8.775,49.975)
RX2_CPU: J8.1 U4.49 | length 11.5
  Top Layer w0.254: U4.49 34.75,29 J8.1@36,29
RX2_WIFI: J8.8 U4.48 | length 9.4
  Top Layer w0.254: U4.48 34.25,40.5 38.5,40.5 J8.8@38.5,36.62
RX3_CPU: J2.4 U4.6 | length 26.8
  Top Layer w0.254: J2.4 6.73,50.625 U4.6
SCK: J6.2 U4.62 | length 19.2
  Top Layer w0.254: v1(35.1,47.8) 35.1,46.625 U4.62
  Bottom Layer w0.254: v1(35.1,47.8) 42.325,47.8 42.325,54.92 J6.2
SGN+_IN: C6.1 J1.3 | length 3.1
  Top Layer w0.254: J1.3@8.895,3.075 C6.1@8.895,6.195
SGN-_IN: C5.1 J1.2 | length 3.1
  Top Layer w0.254: J1.2@6.355,3.075 C5.1@6.355,6.195
SGN_OUT: R10.1 U2.6 U2.7 | length 8.3
  Top Layer w0.254: U2.7@15.115,32.775 15.135,32.8 U2.7@15.135,34.2 ; U2.6@16.385,32.775 16.385,34.2 U2.7@15.135,34.2 ; R10.1 15.75,36 15.135,36 U2.7@15.135,34.2
TCK/SWDCLK: J3.3 R20.1 U4.5 | length 23.6
  Top Layer w0.254: U4.5 v1(22.975,51.125) ; J3.3@23.19,68 23.475,67.715 23.475,66.25 25.3,66.25 R20.1
  Bottom Layer w0.254: v1(22.975,51.125) 22.975,68 J3.3
TDI: J3.5 R19.1 U4.2 | length 25.6
  Top Layer w0.254: U4.2 v1(27.85,52.625) ; R19.1 27.9,68 J3.5 J3.5@28.27,68
  Bottom Layer w0.254: v1(27.85,52.625) 27.85,68 J3.5
TDO/SWO: J3.4 U4.1 | length 19
  Top Layer w0.254: U4.1 21.375,53.55 v1@23.925,53.55
  Bottom Layer w0.254: v1@23.925,53.575 25.53,53.575 J3.4
  other v1: 23.925,53.5
TMS/SWDIO: J3.2 R21.1 U4.3 | length 23.6
  Top Layer w0.254: v1(19.775,52.775) 19.775,52.125 U4.3 ; J3.2@20.65,68 20.65,66.575 22.8,66.575 R21.1
  Bottom Layer w0.254: v1(19.775,52.775) 19.741,52.809 19.741,68 J3.2 J3.2@20.5,67.95
VCC: C_in1.1 J2.2 SW2.2 U10.3 | length 97.3
  Top Layer w0.254: J2.2@11.9,38.6 J2.2@12.2,38.9
  Top Layer w0.508: J2.2@11.9,38.6 11.9,36.725 0.75,36.725 0.75,0.725 17.6,0.725 SW2.2@17.6,2.33
  Bottom Layer w1.016: SW2.2@17.57,2.975 17.57,0.85 29.855,0.85 29.855,3.7 34.4,3.7 ; C_in1.1 34.4,3.7 ; U10.3 37.05,3.7 34.4,3.7
WIFI/BT: PB2.1 R14.1 U4.51 | length 10.6
  Top Layer w0.254: U4.51 42.875,41.125 42.875,42.45 ; R14.1@41.5,42.45 42.875,42.45 ; PB2.1@44.505,42.925 44.505,42.45 42.875,42.45
pads on no net: J6.10 J7.5 J7.6 J8.6 J8.7 R12.2 U4.9 U4.10 U4.11 U4.12 U4.13 U4.14 U4.15 U4.16 U4.18 U4.20 U4.24 U4.29 U4.30 U4.32 U4.33 U4.34 U4.35 U4.36 U4.37 U4.38 U4.39 U4.40 U4.43 U4.44 U4.45 U4.46 U4.47 U4.52 U4.56 U4.57 U4.58 U4.59 U4.64 U4.65 U4.66 U4.67 U4.68 U4.69 U4.70 U4.73 U4.74 U4.75 U4.79 U4.80 U4.81 U4.82 U4.85 U4.86 U4.87 U4.88 U4.89 U4.90 U4.91 U4.92 U4.93 U4.94 U4.95 U4.98 U4.99 U4.100 U9.1 U9.7 X1.2 X1.4

## Polygon pours and split planes (outlines as drawn)
AGND on Bottom Layer "Bottom Layer-No Net" (solid, pour order 12): 3.1,15.3 3.1,32.6 21.2,32.6 22.8,32.6 22.8,15.424
GND on Bottom Layer "Bottom Layer-No Net" (solid, remove dead copper, pour order 14): 0,0 0,70.5 49.5,70.5 49.5,0
AGND on Top Layer "Bottom Layer-No Net" (solid, remove dead copper, pour order 6): 0,0 0,36 27.3,36 27.3,11.676 13.65,11.676 13.65,0

## Keep-outs
Keep-Out Layer:
  the board outline again, w0.156

## Silkscreen, mask and mechanical layers (free items; w line width, h text height)
Top Overlay:
  drawing of 3509 lines, arcs and shapes, not listed
  text "UTN" at 44.825,37.225 h1.52
Mechanical 1:
  lines w0.254: -0.5,-0.5 50,-0.5 50,71 -0.5,71 -0.5,-0.5
Mechanical 13:
  lines w0.254: -3.758,1.67 -3.25,0.146 ; -3.758,68.622 -3.25,70.146 ; -3.504,0.146 -2.996,0.146 ; -3.504,70.146 -2.996,70.146 ; -3.25,30.042 -3.25,0.146 ; -3.25,40.25 -3.25,70.146 ; -2.742,1.67 -3.25,0.146 ; -2.742,68.622 -3.25,70.146 ; -0.65,-2.84 -0.65,-2.332 ; 0.874,-3.094 -0.65,-2.586 ; 0.874,-2.078 -0.65,-2.586 ; 19.246,-2.586 -0.65,-2.586 ; 29.454,-2.586 49.35,-2.586 ; 47.826,-3.094 49.35,-2.586 ; 47.826,-2.078 49.35,-2.586 ; 49.35,-2.84 49.35,-2.332
  text "70 (mm)" at -2.336,30.296 h1.52 r90
  text "50 (mm)" at 19.5,-3.5 h1.52

## Text inside footprints (layer, text, board x,y; h text height)
Led_1: Top Overlay "k" at 37.725,68.4 h0.7